# Altium PCB PCB2.PcbDoc
Units mil, origin at the board's own origin, x right, y up, seen from the top; angles counter-clockwise.
Board outline 6000 x 4000 mil, 2 copper layers (Top Layer, Bottom Layer); 64 components, 29 nets, 148 pads, 8 vias.
Unrouted connection lines stored in the file: 52.
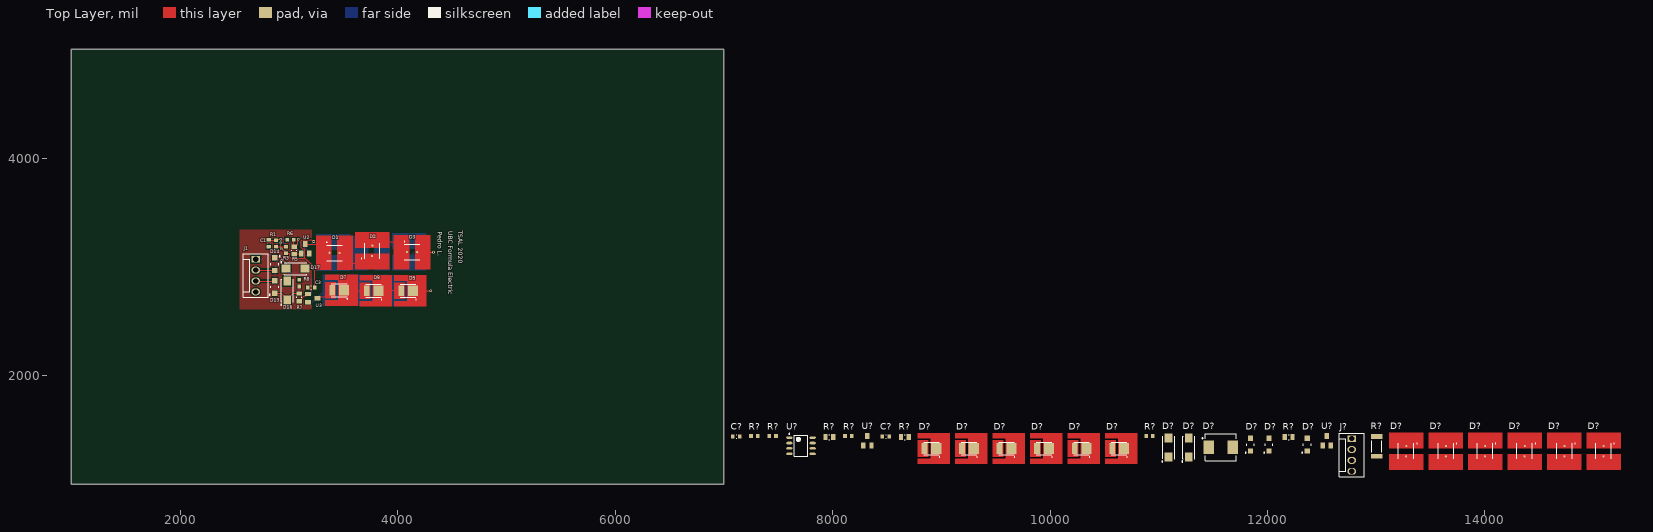
[diagram p0: Top Layer view]
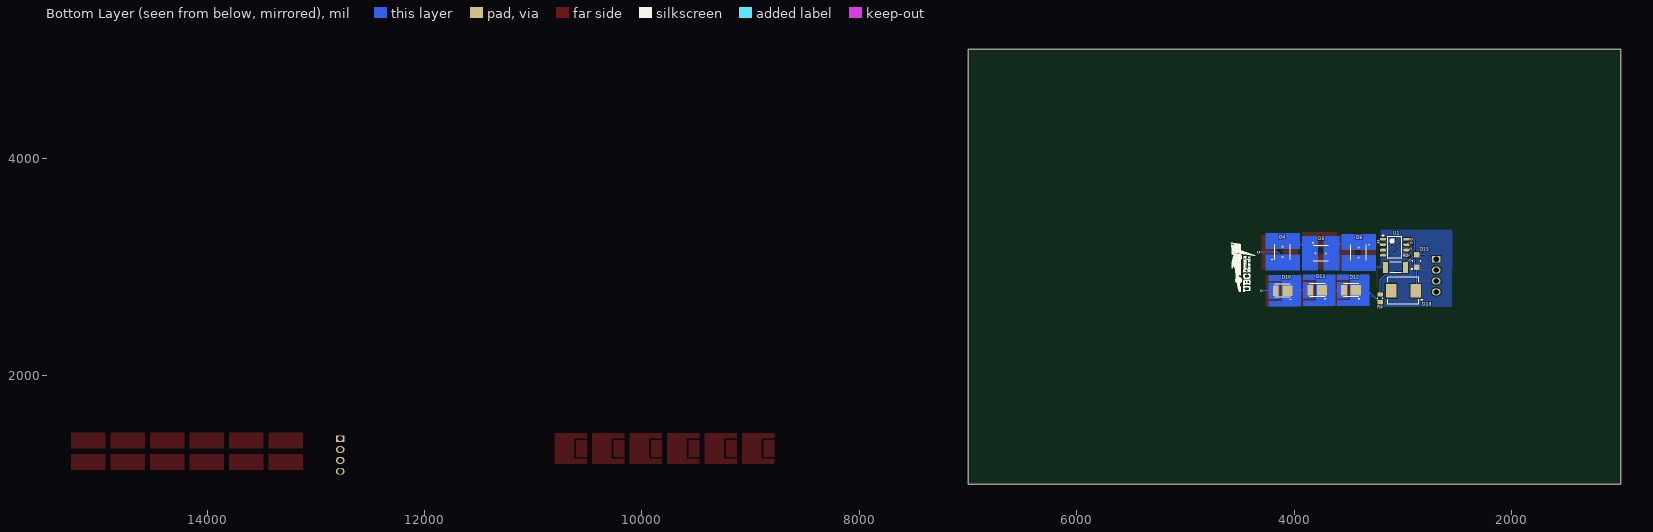
[diagram p1: Bottom Layer view, seen from below]

## Layer stack, top to bottom
Top Solder: solder mask 0.4, Solder Resist, Dk 3.5
Top Layer: signal copper 1.4
Dielectric 1: dielectric 12.6, FR-4, Dk 4.8
Bottom Layer: signal copper 1.4
Bottom Solder: solder mask 0.4, Solder Resist, Dk 3.5

## Board outline
1000,1000 7000,1000 7000,5000 1000,5000

## Design rules (kind name [scope] priority, off if disabled: settings)
Clearance [All] p1: gap=10 ignorepadtopadclearanceinfootprint=FALSE except(0: Arc-Hole Track-Hole SMDPad-Hole THPad-Hole Via-Hole Fill-Hole Poly-Hole Region-Hole Text-Hole)
PolygonConnect [All] p1: connectstyle=Relief reliefconductorwidth=10 reliefentries=4 polygonreliefangle="90 Angle" airgapwidth=10
RoomDefinition TSAL_PL [InComponentClass('TSAL_PL')] p1: confinementstyle=ConfineIn formatcopy=TRUE lockcomponents=FALSE outline 0,0 2000,0 2000,1000 0,1000
RoomDefinition Sheet1 [InComponentClass('Sheet1')] p2: confinementstyle=ConfineIn formatcopy=TRUE lockcomponents=FALSE outline 7045,1060 15255,1060 15255,1580 7045,1580
RoutingVias [All] p1: holewidth=28 width=50 viastyle="Through Hole" minholewidth=28 minwidth=50 maxholewidth=28 maxwidth=50
SolderMaskExpansion [All] p1: expansion=4 istentingtop=FALSE
Width [All] p1: maxlimit=10 minlimit=10 preferedwidth=10
30 further rules are at their usual default settings.

## Classes and differential pairs
component class TSAL_PL: C1 C3 D1 D2 D3 D4 D5 D6 D7 D8 D9 D10 D11 D12 D13 D14 D15 D16 D17 D18 J1 R1 R2 R3 R4 R5 R6 R7 R8 U1 U2 U3
component class Sheet1: C? D? J? R? U?

## Components (designator, comment, footprint, x,y, rotation, side; value= is the part's Value field where it differs from the comment)
C1 "0603" "0603 CAPACITOR (TDK C-SERIES)" 2815,3217.52 r270 top
C3 "0603" "0603 CAPACITOR (TDK C-SERIES)" 3205,2810 r180 top
C? "0603" "0603 CAPACITOR (TDK C-SERIES)" 8490,1440 r0 top
C? "0603" "0603 CAPACITOR (TDK C-SERIES)" 7115,1440 r0 top
D1 "RED" "RED LED" 3419.17,3127.72 r90 top
D2 "RED" "RED LED" 3766.97,3147.24 r180 top
D3 "RED" "RED LED" 4132.76,3135 r90 top
D4 "RED" "RED LED" 4107.91,3137.76 r0 bottom
D5 "RED" "RED LED" 3757.76,3123.03 r90 bottom
D6 "RED" "RED LED" 3410,3132.24 r180 bottom
D7 "GREEN" "GREEN LED" 3497.91,2785.32 r0 top
D8 "GREEN" "GREEN LED" 3814.06,2780.32 r0 top
D9 "GREEN" "GREEN LED" 4131.14,2780 r0 top
D10 "GREEN" "GREEN LED" 4073.86,2780 r180 bottom
D11 "GREEN" "GREEN LED" 3755.79,2785 r180 bottom
D12 "GREEN" "GREEN LED" 3444.61,2785.32 r180 bottom
D13 "NRVTS260ESFT1G" "ON NRVTS260ESFT1G" 2870,2815 r90 top
D14 "NRVTS260ESFT1G" "ON NRVTS260ESFT1G" 2870,3025 r270 top
D15 "NRVTS260ESFT1G" "ON NRVTS260ESFT1G" 2875,3053.07 r90 bottom
D16 "SMAJ6.0A" "LITTELFUSE SMAJ6.0A" 2985,2783.39 r90 top
D17 "SMAJ6.0A" "LITTELFUSE SMAJ6.0A" 3060,2985 r0 top
D18 "SMCJ24A" "LITTELFUSE SMCJ24A" 2997.8,2780 r0 bottom
D? "RED" "RED LED" 14000,1305 r0 top
D? "RED" "RED LED" 15090,1305 r0 top
D? "NRVTS260ESFT1G" "ON NRVTS260ESFT1G" 12365,1365 r90 top
D? "RED" "RED LED" 13640,1305 r0 top
D? "SMAJ6.0A" "LITTELFUSE SMAJ6.0A" 11090,1340 r90 top
D? "SMCJ24A" "LITTELFUSE SMCJ24A" 11570,1340 r0 top
D? "GREEN" "GREEN LED" 9290,1330 r0 top
D? "GREEN" "GREEN LED" 8945,1330 r0 top
D? "NRVTS260ESFT1G" "ON NRVTS260ESFT1G" 12015,1365 r90 top
D? "RED" "RED LED" 13275,1305 r0 top
D? "SMAJ6.0A" "LITTELFUSE SMAJ6.0A" 11275,1340 r90 top
D? "GREEN" "GREEN LED" 9980,1330 r0 top
D? "NRVTS260ESFT1G" "ON NRVTS260ESFT1G" 11845,1365 r90 top
D? "GREEN" "GREEN LED" 10325,1330 r0 top
D? "GREEN" "GREEN LED" 9635,1330 r0 top
D? "RED" "RED LED" 14365,1305 r0 top
D? "RED" "RED LED" 14730,1305 r0 top
D? "GREEN" "GREEN LED" 10670,1330 r0 top
J1 "1x4 Header" HDR1x4 2695,2920 r0 top
J? "1x4 Header" HDR1x4 12775,1270 r0 top
R1 "0603" "0603 RESISTOR (YAGEO)" 2880,3214.49 r90 top
R2 "2010" "2010 RESISTOR (YAGEO)" 3070,2995 r180 bottom
R3 "0603" "0603 RESISTOR (YAGEO)" 2975,3155 r90 top
R4 "RL1220S-270-F" "0805 RESISTOR (YAGEO)" 3210,2710 r90 bottom
R5 "0805" "0805 RESISTOR (YAGEO)" 3050,3150.43 r270 top
R6 "0603" "0603 RESISTOR (YAGEO)" 3014.49,3250 r0 top
R7 "0805" "0805 RESISTOR (YAGEO)" 3095,2720.43 r270 top
R8 "0603" "0603 RESISTOR (YAGEO)" 3095,2850 r270 top
R? "0805" "0805 RESISTOR (YAGEO)" 7970,1435 r0 top
R? "0603" "0603 RESISTOR (YAGEO)" 10915,1445 r0 top
R? "0603" "0603 RESISTOR (YAGEO)" 7280,1445 r0 top
R? "2010" "2010 RESISTOR (YAGEO)" 13005,1350 r90 top
R? "0603" "0603 RESISTOR (YAGEO)" 8145,1445 r0 top
R? "0805" "0805 RESISTOR (YAGEO)" 12195,1435 r0 top
R? "RL1220S-270-F" "0805 RESISTOR (YAGEO)" 8665,1435 r0 top
R? "0603" "0603 RESISTOR (YAGEO)" 7450,1445 r0 top
U1 "555" SOIC-8 3077.72,3180 r180 bottom
U2 "2N7002ET1G" 2N7002ET1G 3150,3165 r0 top
U3 "2N7002ET1G" 2N7002ET1G 3218.31,2712.4 r270 top
U? "555" SOIC-8 7710,1355 r0 top
U? "2N7002ET1G" 2N7002ET1G 8320,1400 r0 top
U? "2N7002ET1G" 2N7002ET1G 12545,1400 r0 top

## Footprints (in the part's own frame and the unit in brackets; to place one, negate y for a bottom-side part, rotate by r counter-clockwise, add the part's x,y. Pads: shape width x height; smd on the part's side, far side on the other; paste and mask are expansions set on the pad)
2N7002ET1G [mm]
  rect 1x1.4 smd: 1(-0.95,-1.1) 2(0.95,-1.1) 3(0,1.1)
  body extent -1.5,-1.4 1.55,1.24, height 1.12
"0603 CAPACITOR (TDK C-SERIES)" [mm] "Chip Capacitor, 2-Leads, Body 1.60x0.80mm, IPC Medium Density"
  rect 0.8x0.95 smd: 1(-0.825,0) 2(0.825,0)
  silkscreen extent -0.05,-0.38 0.05,0.38, body extent -0.85,-0.45 0.85,0.45, height 0.9
"0603 RESISTOR (YAGEO)" [mm] "Chip Resistor, 2-Leads, Body 1.60x0.80mm, IPC Medium Density"
  rect 0.85x0.9 smd: 1(-0.775,0) 2(0.775,0)
  body extent -0.85,-0.45 0.85,0.45, height 0.55
"0805 RESISTOR (YAGEO)" [mm] "Chip Resistor, 2-Leads, Body 2.00x1.25mm, IPC Medium Density"
  rect 1x1.35 smd: 1(-0.9,0) 2(0.9,0)
  silkscreen extent -0.1,-0.58 0.1,0.58, body extent -1.05,-0.67 1.05,0.67, height 0.6
"2010 RESISTOR (YAGEO)" [mm] "Chip Resistor, 2-Leads, Body 5.00x2.50mm, IPC Medium Density"
  rect 1.15x2.65 smd: 1(-2.325,0) 2(2.325,0)
  silkscreen extent -1.35,-1.22 1.35,1.23, body extent -2.55,-1.33 2.55,1.33, height 0.65
"GREEN LED" [mm]
  rect 1.35x2.5 smd: 1(-2.5,0)
  rect 2.35x2.5 smd: 2(0.225,0)
  Top Layer region: -4.1,-3.6 -4.1,-2.4 -1.1,-2.4 -1.1,-1.25 -1.1,1.25 -1.1,2.4 -4.1,2.4 -4.1,3.6 3.4,3.6 3.4,-3.6
  Top Layer region: -4.1,-1.9 -1.7,-1.9 -1.7,-1.25 -1.7,1.25 -1.7,1.9 -4.1,1.9
  silkscreen extent -2.75,-2.07 1.07,1.5, body extent -2.65,-1.35 0.85,1.45, height 0.81
HDR1x4 [mm]
  rect 2x1.6 hole 1.2: 1(0,3.81)
  oval 2x1.6 hole 1.2: 2(0,1.27) 3(0,-1.27) 4(0,-3.81)
  silkscreen extent -2.92,-5.08 2.92,5.08, body extent -2.9,-5.08 2.9,5.08, height 11.07
"LITTELFUSE SMAJ6.0A" [mm] "TVS DIODE 6V 10.3V DO214AC"
  rect 2.1x1.8 smd: 1(-2.2,0) 2(2.2,0)
  silkscreen extent -3.42,-1.4 2.65,1.57, body extent -2.86,-1.4 2.86,1.4, height 2.29
"LITTELFUSE SMCJ24A" [mm] "TVS DIODE 24V 38.9V DO214AB"
  rect 2.45x3.15 smd: 1(-2.85,0) 2(2.85,0)
  silkscreen extent -4.37,-3.15 3.6,3.15, body extent -3.77,-3.11 3.77,3.11, height 2.62
"ON NRVTS260ESFT1G" [mm] "DIODE SCHOTTKY 60V 2A SOD123FL"
  rect 1.25x1.22 smd: 1(-1.475,0) 2(1.475,0)
  silkscreen extent -1.97,-0.9 0.2,1.28, body extent -2.12,-0.9 2.12,0.9, height 0.98
"RED LED" [mm]
  round 0.5 smd: 1(0.05,1.2) 2(0,-1.2)
  Top Layer region: 4,0.7 4,4.3 -3.95,4.3 -3.95,0.7
  Top Layer region: 4,-0.7 4,-4.3 -3.95,-4.3 -3.95,-0.7
  Top Layer region: -1.4,-0.7 -1.4,-1.7 -0.5,-1.7 -0.5,-2.5 0.5,-2.5 0.5,-1.7 1.4,-1.7 1.4,-0.7
  Top Layer region: -1.4,0.7 -1.4,1.7 -0.5,1.7 -0.5,2.5 0.5,2.5 0.5,1.7 1.4,1.7 1.4,0.7
  silkscreen extent -1.8,-1.8 2.57,1.87, body extent -1.8,-1.86 1.7,1.76, height 1.26
SOIC-8 [mm] "SOIC, 8-Leads, Body 4.91x3.90mm, Pitch 1.27mm, IPC Medium Density"
  oval 1.45x0.6 smd: 1(-2.725,1.905) 2(-2.725,0.635) 3(-2.725,-0.635) 4(-2.725,-1.905) 5(2.725,-1.905) 6(2.725,-0.635) 7(2.725,0.635) 8(2.725,1.905)
  silkscreen extent -2.85,-2.5 1.6,2.88, body extent -3,-2.5 3,2.5, height 1.75

## Part data
C1 C?: library part CL10B103KB8NNNC, "Cap Ceramic 0.01uF 50VDC X7R 10% SMD 0603 Paper T/R", Capacitance=10nF, Case Code (Metric)=1608, Dielectric=X7R, Manufacturer=Samsung, Max Operating Temperature=125°C, Min Operating Temperature=-55°C, Package Quantity=1, Supplier Part Number 1=1276-1009-1-ND, Tolerance=10%, Voltage=50V, Case Code (Imperial)=0603, Case/Package=0603, Category="Ceramic Capacitors", ComponentLink1Description=https://datasheet.ciiva.com/15195/getdatasheetpartid-357415-15195721.pdf?src-supplier=Verical, ComponentLink1URL=https://datasheet.ciiva.com/15195/getdatasheetpartid-357415-15195721.pdf?src-supplier=Verical, ComponentLink2Description=https://datasheet.ciiva.com/29198/457455-da-01-en-vs-kondensator-0603-29198644.pdf?src-supplier=Conrad, ComponentLink2URL=https://datasheet.ciiva.com/29198/457455-da-01-en-vs-kondensator-0603-29198644.pdf?src-supplier=Conrad, ComponentLink3Description=https://datasheet.ciiva.com/20173/71-0315-20173334.pdf?src-supplier=Rapid+Electronics, ComponentLink3URL=https://datasheet.ciiva.com/20173/71-0315-20173334.pdf?src-supplier=Rapid+Electronics, Contact Plating=Tin, Depth=0.8mm, Height=0.8mm, Lead Free="Lead Free", Length=1.6mm, Manufacturer Part Number=CL10B103KB8NNNC, Material=Ceramic, Mount="Surface Mount", Packaging="Cut Tape", Pricing 1="1=0.10000, 10=0.02700, 50=0.01480, 100=0.01210, 500=0.00866, 1000=0.00681 (USD)", Radiation Hardening=No, RoHS=Yes, Stock 1=3003971, Supplier 1=Digi-Key, Thickness=0.035inch, Voltage Rating=50V, Voltage Rating (DC)=50V, Width=0.031inch
C3 C?: library part UMK107ABJ105KAHT, "CAP ,MLCC ,0603,50V ,X5R,1uF 10% ,T&R", Capacitance=1uF, Case Code (Metric)=1608, Dielectric=X5R, Manufacturer="Taiyo Yuden", Max Operating Temperature=85°C, Min Operating Temperature=-55°C, Package Quantity=1, Ratings=AEC-Q200, Supplier Part Number 1=587-3501-1-ND, Tolerance=10%, Voltage Rating=50V, Case Code (Imperial)=0603, Case/Package=0603, Category="Ceramic Capacitors", ComponentLink1Description=https://datasheet.ciiva.com/18697/mlcc01-hq-e-18697528.pdf?src-supplier=Digi-Key, ComponentLink1URL=https://datasheet.ciiva.com/18697/mlcc01-hq-e-18697528.pdf?src-supplier=Digi-Key, ComponentLink2Description=https://datasheet.ciiva.com/18697/mlcc01-hq-e-18697529.pdf?src-supplier=Digi-Key, ComponentLink2URL=https://datasheet.ciiva.com/18697/mlcc01-hq-e-18697529.pdf?src-supplier=Digi-Key, ComponentLink3Description=https://datasheet.ciiva.com/18697/mlcc01-hq-e-18697530.pdf?src-supplier=Digi-Key, ComponentLink3URL=https://datasheet.ciiva.com/18697/mlcc01-hq-e-18697530.pdf?src-supplier=Digi-Key, Halogen Free="Halogen Free", Height=0.8mm, Lead Free="Lead Free", Length=0.063inch, Manufacturer Part Number=UMK107ABJ105KAHT, Mount="Surface Mount", Packaging="Cut Tape", Pricing 1="1=0.18000, 10=0.12600, 50=0.07560, 100=0.06380, 500=0.04368, 1000=0.03864 (USD)", RoHS=Yes, Stock 1=36801, Supplier 1=Digi-Key, Termination=SMD/SMT, Thickness=0.035inch, Voltage Rating (DC)=50V, Width=0.8mm
D1 D2 D3 D4 D5 D6 D? D? D? D? D? D?: library part OVS5MRBCR4, "LED 0.33W RED WTR CLR 3.5MM", Case/Package=SMD/SMT, Color=Red, Forward Current=200mA, Forward Voltage=2.2V, Manufacturer="TT Optek", Max Operating Temperature=100°C, Max Power Dissipation=330mW, Min Operating Temperature=-40°C, Package Quantity=1, Power Dissipation=750mW, Power Rating=500mW, Reverse Voltage=12V, Supplier Part Number 1=365-1546-1-ND, Test Current=150mA, Category=LEDs, ComponentLink1Description=https://datasheet.ciiva.com/2126/ovs5mabcr4-2126832.pdf?src-supplier=Digi-Key, ComponentLink1URL=https://datasheet.ciiva.com/2126/ovs5mabcr4-2126832.pdf?src-supplier=Digi-Key, ComponentLink2Description=https://datasheet.ciiva.com/16224/ovs5mrbcr4-16224208.pdf?src-supplier=Future+Electronics, ComponentLink2URL=https://datasheet.ciiva.com/16224/ovs5mrbcr4-16224208.pdf?src-supplier=Future+Electronics, ComponentLink3Description=https://datasheet.ciiva.com/2126/ovs5mabcr4-2126833.pdf?src-supplier=Digi-Key, ComponentLink3URL=https://datasheet.ciiva.com/2126/ovs5mabcr4-2126833.pdf?src-supplier=Digi-Key, ComponentLink4Description=https://datasheet.ciiva.com/46403/ovs5mabcr4-46403613.pdf?src-supplier=Element14, ComponentLink4URL=https://datasheet.ciiva.com/46403/ovs5mabcr4-46403613.pdf?src-supplier=Element14, ComponentLink5Description=https://datasheet.ciiva.com/2126/ovs5mabcr4-2126831.pdf?src-supplier=Digi-Key, ComponentLink5URL=https://datasheet.ciiva.com/2126/ovs5mabcr4-2126831.pdf?src-supplier=Digi-Key, Depth=3.5mm, Dominant Wavelength=625nm, Illumination Color=Red, Lead Free="Lead Free", Length=3.5mm, Lens Style=Clear,Diffused,Colorless, Luminous Intensity=7150mcd, Manufacturer Part Number=OVS5MRBCR4, Max Current Rating=200mA, Mount="Surface Mount", Number of Elements=1, Number of Pins=2, Packaging="Cut Tape", Pricing 1="1=0.96000, 100=0.92400, 250=0.88000, 500=0.85800 (USD)", REACH SVHC="No SVHC", RoHS=Yes, Stock 1=10132, Supplier 1=Digi-Key, Viewing Angle=120°, Wavelength=625nm
D7 D8 D9 D10 D11 D12 D? D? D? D? D? D?: library part XZDG25X109FS, "Led 3.5X2.8 0.5W SMD Green", Case Code (Imperial)=1411, Case Code (Metric)=3528, Color=Green, Forward Voltage=3.5V, Lens Color=Colorless, Manufacturer=SunLED, Supplier Part Number 1=1497-1345-1-ND, Test Current=150mA, Case/Package=1411, Category=LEDs, ComponentLink1Description=http://www.sunledusa.com/products/spec/XZDG25X109FS.pdf?src-supplier=Digi-Key, ComponentLink1URL=http://www.sunledusa.com/products/spec/XZDG25X109FS.pdf?src-supplier=Digi-Key, ComponentLink2Description=https://www.sunledusa.com/products/spec/XZDG25X109FS.pdf?src-supplier=Digi-Key, ComponentLink2URL=https://www.sunledusa.com/products/spec/XZDG25X109FS.pdf?src-supplier=Digi-Key, Dominant Wavelength=525nm, Height=1.05mm, Length=3.5mm, Lens Size=2.5mm, Lens Style=Round,Flat, Lens Transparency=Clear, Luminous Intensity=6990mcd, Manufacturer Part Number=XZDG25X109FS, Mount="Surface Mount", Packaging="Cut Tape", Pricing 1="1=1.83000, 10=1.61300, 100=0.93630, 500=0.84640, 1000=0.72738 (USD)", RoHS=No, Stock 1=1496, Supplier 1=Digi-Key, Viewing Angle=120°, Width=2.8mm
D13 D14 D15 D? D? D?: "ON SEMICONDUCTOR - NRVTS260ESFT1G - Schottky Rectifier, 60 V, 2 A, Single, SOD-123, 2 Pins, 650 mV", Average Rectified Current=2A, Case/Package=SOD, Forward Voltage=650mV, Manufacturer="ON Semiconductor", Max Forward Surge Current (Ifsm)=25A, Max Operating Temperature=175°C, Max Repetitive Reverse Voltage (Vrrm)=60V, Max Reverse Current=12uA, Min Operating Temperature=-65°C, Package Quantity=1, Peak Non-Repetitive Surge Current=50A, Supplier Part Number 1=NRVTS260ESFT1GOSCT-ND, Category="Schottky Diodes", ComponentLink1Description=https://datasheet.ciiva.com/53019/nts260esf-d-53019548.pdf?src-supplier=Digi-Key, ComponentLink1URL=https://datasheet.ciiva.com/53019/nts260esf-d-53019548.pdf?src-supplier=Digi-Key, Element Configuration=Single, Forward Current=2A, Height=0.88mm, Lead Free="Lead Free", Length=2.9mm, Manufacturer Part Number=NRVTS260ESFT1G, Max Reverse Voltage (DC)=60V, Mount="Surface Mount", Number of Pins=2, Packaging="Cut Tape", Pricing 1="1=0.34000, 10=0.22100, 100=0.11060, 500=0.09164, 1000=0.06004 (USD)", REACH SVHC="No SVHC", Reverse Voltage (DC)=60V, RoHS=Yes, Supplier 1=Digi-Key, Width=1.8mm
D16 D17 D? D?: "In a Pack of 25, Littelfuse SMAJ6.0A, Uni-Directional TVS Diode, 400W, 2-Pin DO-214AC", Breakdown Voltage=6.67V, Clamping Voltage=10.3V, Current=41A, Leakage Current=1uA, Manufacturer=Littelfuse, Max Breakdown Voltage=7.37V, Max Operating Temperature=150°C, Max Power Dissipation=3.3W, Max Surge Current=38.8A, Min Operating Temperature=-55°C, Operating Supply Voltage=6V, Package Quantity=1, Peak Pulse Current=4.1A, Peak Pulse Power=400W, Power Line Protection=No, Resistor Type=Zener, Reverse Breakdown Voltage=66.7V, Supplier Part Number 1=SMAJ6.0ALFCT-ND, Test Current=1mA, Voltage=60V, Category="TVS Diodes", ComponentLink1Description=https://datasheet.ciiva.com/330/littelfuse-tvs-diode-smaj-datasheet-pdf-330721.pdf?src-supplier=Digi-Key, ComponentLink1URL=https://datasheet.ciiva.com/330/littelfuse-tvs-diode-smaj-datasheet-pdf-330721.pdf?src-supplier=Digi-Key, ComponentLink2Description=https://datasheet.ciiva.com/330/littelfuse-tvs-diode-smaj-datasheet-pdf-330722.pdf?src-supplier=Digi-Key, ComponentLink2URL=https://datasheet.ciiva.com/330/littelfuse-tvs-diode-smaj-datasheet-pdf-330722.pdf?src-supplier=Digi-Key, ComponentLink3Description=https://datasheet.ciiva.com/330/littelfuse-tvs-diode-smaj-datasheet-pdf-330723.pdf?src-supplier=Digi-Key, ComponentLink3URL=https://datasheet.ciiva.com/330/littelfuse-tvs-diode-smaj-datasheet-pdf-330723.pdf?src-supplier=Digi-Key, ComponentLink4Description=https://datasheet.ciiva.com/330/littelfuse-tvs-diode-smaj-datasheet-pdf-330712.pdf?src-supplier=Digi-Key, ComponentLink4URL=https://datasheet.ciiva.com/330/littelfuse-tvs-diode-smaj-datasheet-pdf-330712.pdf?src-supplier=Digi-Key, ComponentLink5Description=https://datasheet.ciiva.com/28473/607617-28473464.pdf?src-supplier=Element14, ComponentLink5URL=https://datasheet.ciiva.com/28473/607617-28473464.pdf?src-supplier=Element14, ComponentLink6Description=https://datasheet.ciiva.com/330/littelfuse-tvs-diode-smaj-datasheet-pdf-330713.pdf?src-supplier=Digi-Key, ComponentLink6URL=https://datasheet.ciiva.com/330/littelfuse-tvs-diode-smaj-datasheet-pdf-330713.pdf?src-supplier=Digi-Key, ComponentLink7Description=https://datasheet.ciiva.com/16391/littelfuse-tvs-diode-smaj-16391801.pdf?src-supplier=Future+Electronics, ComponentLink7URL=https://datasheet.ciiva.com/16391/littelfuse-tvs-diode-smaj-16391801.pdf?src-supplier=Future+Electronics, ComponentLink8Description=https://datasheet.ciiva.com/16487/littelfuse-tvs-diode-smaj-16487499.pdf?src-supplier=Future+Electronics, ComponentLink8URL=https://datasheet.ciiva.com/16487/littelfuse-tvs-diode-smaj-16487499.pdf?src-supplier=Future+Electronics, Direction=Unidirectional, Height=2.29mm, Lead Free="Lead Free", Length=5.28mm, Manufacturer Part Number=SMAJ6.0A, Min Breakdown Voltage=6.67V, Mount="Surface Mount", Number of Channels=1, Number of Elements=1, Number of Pins=2, Number of Unidirectional Channels=1, Packaging="Cut Tape", Polarity=Unidirectional, Power Dissipation=400W, Pricing 1="1=0.36000, 10=0.24800, 100=0.14180, 500=0.10800, 1000=0.07875, 2000=0.07650 (USD)", Radiation Hardening=No, REACH SVHC="No SVHC", Reverse Standoff Voltage=6V, RoHS=Yes, Stock 1=50756, Supplier 1=Digi-Key, Termination=SMD/SMT, Voltage Rating (DC)=6V, Width=2.79mm
D18 D?: "LITTELFUSE - SMCJ24A - TVS Diode, TRANSZORB SMCJ Series, Unidirectional, 24 V, 38.9 V, DO-214AB (SMC), 2 Pins", Breakdown Voltage=26.7V, Clamping Voltage=38.9V, Leakage Current=1uA, Manufacturer=Littelfuse, Max Breakdown Voltage=29.5V, Max Operating Temperature=150°C, Max Power Dissipation=6.5W, Max Surge Current=38.6A, Min Operating Temperature=-65°C, Operating Supply Voltage=24V, Package Quantity=1, Peak Pulse Power=1.5kW, Power Line Protection=No, Resistor Type=Zener, Supplier Part Number 1=SMCJ24ALFCT-ND, Test Current=1mA, Category=Diodes, ComponentLink1Description=https://datasheet.ciiva.com/341/littelfuse-tvs-diode-smcj-datasheet-pdf-341029.pdf?src-supplier=Digi-Key, ComponentLink1URL=https://datasheet.ciiva.com/341/littelfuse-tvs-diode-smcj-datasheet-pdf-341029.pdf?src-supplier=Digi-Key, ComponentLink2Description=https://datasheet.ciiva.com/8062/littelfuse-tvs-diode-smcj-8062373.pdf?src-supplier=Element14, ComponentLink2URL=https://datasheet.ciiva.com/8062/littelfuse-tvs-diode-smcj-8062373.pdf?src-supplier=Element14, ComponentLink3Description=https://datasheet.ciiva.com/341/littelfuse-tvs-diode-smcj-datasheet-pdf-341030.pdf?src-supplier=Digi-Key, ComponentLink3URL=https://datasheet.ciiva.com/341/littelfuse-tvs-diode-smcj-datasheet-pdf-341030.pdf?src-supplier=Digi-Key, ComponentLink4Description=https://datasheet.ciiva.com/341/littelfuse-tvs-diode-smcj-datasheet-pdf-341031.pdf?src-supplier=Digi-Key, ComponentLink4URL=https://datasheet.ciiva.com/341/littelfuse-tvs-diode-smcj-datasheet-pdf-341031.pdf?src-supplier=Digi-Key, Direction=Unidirectional, Element Configuration=Single, Height=2.417mm, Lead Free="Lead Free", Length=7.11mm, Manufacturer Part Number=SMCJ24A, Max Reverse Leakage Current=1uA, Min Breakdown Voltage=26.7V, Mount="Surface Mount", Number of Channels=1, Number of Elements=1, Number of Pins=2, Number of Unidirectional Channels=1, Packaging="Cut Tape", Peak Pulse Current=38.6A, Polarity=Unidirectional, Power Dissipation=1.5kW, Pricing 1="1=0.55000, 10=0.43800, 100=0.31250, 500=0.23750, 1000=0.18750 (USD)", REACH SVHC="No SVHC", Reverse Breakdown Voltage=26.7V, Reverse Standoff Voltage=24V, RoHS=Yes, Stock 1=17092, Supplier 1=Digi-Key, Termination=SMD/SMT, Voltage Rating (DC)=24V, Width=6.22mm
J1 J?: library part 22-27-2041, "Conn Wire to Board HDR 4 POS 2.54mm Solder ST Thru-Hole Bag", Color=Natural, Contact Resistance=10mR, Housing Color=White, Manufacturer=Molex, Max Operating Temperature=75°C, Min Operating Temperature=0°C, Supplier Part Number 1=WM4113-ND, Category="Headers and Wire Housings", ComponentLink1Description=https://datasheet.ciiva.com/6813/022272021-sd-6813678.pdf?src-supplier=Digi-Key, ComponentLink1URL=https://datasheet.ciiva.com/6813/022272021-sd-6813678.pdf?src-supplier=Digi-Key, ComponentLink2Description=https://datasheet.ciiva.com/7844/1625756-7844114.pdf?src-supplier=Element14, ComponentLink2URL=https://datasheet.ciiva.com/7844/1625756-7844114.pdf?src-supplier=Element14, ComponentLink3Description=https://datasheet.ciiva.com/11746/0900766b80462714-11746241.pdf?src-supplier=RSComponents, ComponentLink3URL=https://datasheet.ciiva.com/11746/0900766b80462714-11746241.pdf?src-supplier=RSComponents, ComponentLink4Description=https://datasheet.ciiva.com/20207/22-0838e-20207115.pdf?src-supplier=Rapid+Electronics, ComponentLink4URL=https://datasheet.ciiva.com/20207/22-0838e-20207115.pdf?src-supplier=Rapid+Electronics, ComponentLink5Description=https://datasheet.ciiva.com/15217/getdatasheetpartid-176661-15217685.pdf?src-supplier=Verical, ComponentLink5URL=https://datasheet.ciiva.com/15217/getdatasheetpartid-176661-15217685.pdf?src-supplier=Verical, ComponentLink6Description=https://datasheet.ciiva.com/49385/879300-49385686.pdf?src-supplier=Jameco, ComponentLink6URL=https://datasheet.ciiva.com/49385/879300-49385686.pdf?src-supplier=Jameco, Connector Type="Male Pin", Contact Material=Brass, Contact Mating Length=0.295inch, Contact Plating=Tin,Copper, Depth=5.8mm, Fastening Type=Friction, Gender=Male, Housing Material=Nylon, Length=10.16mm, Manufacturer Part Number=22-27-2041, Mount="Surface Mount", Number of Contacts=4, Number of Positions=4, Number of Rows=1, Orientation=Straight, Packaging="Cut Tape", Pitch=2.54mm, Pricing 1="1=0.40000, 10=0.38300, 100=0.26800, 500=0.22974, 1000=0.19145, 5000=0.16410, 10000=0.15316 (USD)", RoHS=Yes, Stock 1=5089, Supplier 1=Digi-Key, Termination=Solder
R1 R?: library part CRCW060322K0FKEAC, "Res Thick Film 0603 22K Ohm 1% 1/10W ±100ppm/°C Molded SMD Paper T/R", Case/Package=Molded, Manufacturer="Vishay Semiconductors", Max Operating Temperature=155°C, Min Operating Temperature=-55°C, Power Rating=100mW, Resistance=22k, Resistor Type="Thick Film", Supplier Part Number 1=541-4036-1-ND, Temperature Coefficient=100ppm/°C, Tolerance=1%, Category=Resistors, ComponentLink1Description=http://www.vishay.com/docs/28773/crcwce3.pdf?src-supplier=Digi-Key, ComponentLink1URL=http://www.vishay.com/docs/28773/crcwce3.pdf?src-supplier=Digi-Key, ComponentLink2Description=http://www.vishay.com/docs/20035/dcrcwe3.pdf?src-supplier=Avnet+Asia, ComponentLink2URL=http://www.vishay.com/docs/20035/dcrcwe3.pdf?src-supplier=Avnet+Asia, Contact Plating=Tin, Lead Free="Lead Free", Length=1.55mm, Manufacturer Part Number=CRCW060322K0FKEAC, Mount="Surface Mount", Pricing 1="1=0.10000, 10=0.03100, 100=0.01260, 1000=0.00567, 2500=0.00492 (USD)", RoHS=Yes, Stock 1=48223, Supplier 1=Digi-Key, Termination=Wraparound
R2 R?: "TE CONNECTIVITY - CRGP2010F100R - RES, 100R, 1%, 1.25W, 2010, THICK FILM", Manufacturer="TE Connectivity", Manufacturer Part Number=CRGP2010F100R, Resistence=100R, Supplier Part Number 1=A130648CT-ND, Category="Chip SMD Resistors", ComponentLink1Description=https://www.te.com/commerce/DocumentDelivery/DDEController?Action=srchrtrv&amp;DocNm=9-1773463-9&amp;DocType=DS&amp;DocLang=English&src-supplier=Digi-Key, ComponentLink1URL=https://www.te.com/commerce/DocumentDelivery/DDEController?Action=srchrtrv&amp;DocNm=9-1773463-9&amp;DocType=DS&amp;DocLang=English&src-supplier=Digi-Key, ComponentLink2Description=https://4donline.ihs.com/images/VipMasterIC/IC/TYEL/TYEL-S-A0005460475/TYEL-S-A0005460475-1.pdf?hkey=52A5661711E402568146F3353EA87419&src-supplier=Farnell, ComponentLink2URL=https://4donline.ihs.com/images/VipMasterIC/IC/TYEL/TYEL-S-A0005460475/TYEL-S-A0005460475-1.pdf?hkey=52A5661711E402568146F3353EA87419&src-supplier=Farnell, ComponentLink3Description=https://4donline.ihs.com/images/VipMasterIC/IC/TYEL/TYEL-S-A0005460475/TYEL-S-A0005460475-1.pdf?hkey=52A5661711E402568146F3353EA87419&src-supplier=Newark, ComponentLink3URL=https://4donline.ihs.com/images/VipMasterIC/IC/TYEL/TYEL-S-A0005460475/TYEL-S-A0005460475-1.pdf?hkey=52A5661711E402568146F3353EA87419&src-supplier=Newark, Pricing 1="1=0.37000, 10=0.28600, 100=0.12040, 1000=0.06643 (USD)", RoHS=No, Stock 1=14514, Supplier 1=Digi-Key
R3 R6 R8 R? R? R?: library part CRCW0603200KFKEAC, "Res Thick Film 0603 200K Ohm 1% 1/10W ±100ppm/°C Molded SMD Paper T/R", Case/Package=Molded, Manufacturer=Vishay, Max Operating Temperature=155°C, Min Operating Temperature=-55°C, Power Rating=100mW, Resistance=200k, Resistor Type="Thick Film", Supplier Part Number 1=541-4027-1-ND, Temperature Coefficient=100ppm/°C, Tolerance=1%, Category=Resistors, ComponentLink1Description=http://www.vishay.com/docs/28773/crcwce3.pdf?src-supplier=Digi-Key, ComponentLink1URL=http://www.vishay.com/docs/28773/crcwce3.pdf?src-supplier=Digi-Key, Contact Plating=Tin, Lead Free="Lead Free", Length=1.55mm, Manufacturer Part Number=CRCW0603200KFKEAC, Mount="Surface Mount", Pricing 1="1=0.10000, 10=0.03100, 100=0.01260, 1000=0.00567, 2500=0.00492 (USD)", RoHS=Yes, Stock 1=12235, Supplier 1=Digi-Key, Termination=Wraparound
R4 R?: "RES SMD 27 OHM 1% 1/3W 0805", Case/Package=0805, Manufacturer=Susumu, Package Quantity=1, Resistance=27R, Supplier Part Number 1=408-1396-1-ND, Category="Chip SMD Resistors", ComponentLink1Description=http://www.mouser.com/ds/2/392/RL_Data_sheet-263250.pdf?src-supplier=Mouser, ComponentLink1URL=http://www.mouser.com/ds/2/392/RL_Data_sheet-263250.pdf?src-supplier=Mouser, ComponentLink2Description=http://www.susumu.co.jp/common/pdf/n_catalog_partition08_en.pdf?src-supplier=Digi-Key, ComponentLink2URL=http://www.susumu.co.jp/common/pdf/n_catalog_partition08_en.pdf?src-supplier=Digi-Key, Height=0.4mm, Length=2mm, Manufacturer Part Number=RL1220S-270-F, Packaging="Cut Tape", Pricing 1="1=0.34000, 10=0.28900, 25=0.21000, 50=0.15220, 100=0.11290, 250=0.08664, 500=0.06826, 1000=0.04725 (USD)", RoHS=Yes, Stock 1=2466, Supplier 1=Digi-Key, Termination=SMD/SMT, Weight=0.000194oz, Width=1.25mm
R5 R7 R? R?: library part RT0805DRD07100RL, "RES SMD 100 OHM 0.5% 1/8W 0805", Case Code (Metric)=2012, Manufacturer=Yageo, Max Operating Temperature=155°C, Max Power Dissipation=125mW, Min Operating Temperature=-55°C, Package Quantity=1, Resistance=100R, Resistor Type="Thin Film", Supplier Part Number 1=311-2698-1-ND, Temperature Coefficient=25ppm/°C, Tolerance=0.5%, Voltage Rating (DC)=150V, Case Code (Imperial)=0805, Case/Package=0805, Category="Chip SMD Resistors", ComponentLink1Description=https://datasheet.ciiva.com/2575/pyu-rt-1-to-0-05-rohs-l-5-2575581.pdf?src-supplier=Digi-Key, ComponentLink1URL=https://datasheet.ciiva.com/2575/pyu-rt-1-to-0-05-rohs-l-5-2575581.pdf?src-supplier=Digi-Key, Contact Plating=Tin,Matte, Features="Moisture Resistant", Height=0.024inch, Lead Free="Lead Free", Length=0.079inch, Manufacturer Part Number=RT0805DRD07100RL, Number of Terminations=2, Packaging="Cut Tape", Power Rating=125mW, Pricing 1="1=0.23000, 10=0.19200, 100=0.07490, 1000=0.03137, 2500=0.02876 (USD)", Radiation Hardening=No, RoHS=Yes, Stock 1=7222, Supplier 1=Digi-Key, Width=0.049inch
U1 U?: library part SA555DRG4, "IC OSC SGL TIMER 100KHZ 8-SOIC", Case/Package=SOIC, Frequency=100kHz, High Level Output Current=-200mA, Low Level Output Current=200mA, Manufacturer="Texas Instruments", Max Operating Temperature=85°C, Max Supply Voltage=16V, Min Operating Temperature=-40°C, Min Supply Voltage=4.5V, Nominal Supply Current=2mA, Operating Supply Current=10mA, Package Quantity=1, Quiescent Current=15mA, Supplier Part Number 1=296-48948-1-ND, Category="Timers and Oscillators", ComponentLink1Description=https://datasheet.ciiva.com/26943/getdatasheetpartid-624446-26943897.pdf?src-supplier=Verical, ComponentLink1URL=https://datasheet.ciiva.com/26943/getdatasheetpartid-624446-26943897.pdf?src-supplier=Verical, ComponentLink2Description=https://datasheet.ciiva.com/1235/sa555-1235928.pdf?src-supplier=Digi-Key, ComponentLink2URL=https://datasheet.ciiva.com/1235/sa555-1235928.pdf?src-supplier=Digi-Key, ComponentLink3Description=https://datasheet.ciiva.com/14274/se555m-14274518.pdf?src-supplier=Avnet, ComponentLink3URL=https://datasheet.ciiva.com/14274/se555m-14274518.pdf?src-supplier=Avnet, Lead Free="Lead Free", Manufacturer Part Number=SA555DRG4, Mount="Surface Mount", Number of Pins=8, Number of Timers/Counters=1, Packaging="Cut Tape", Pricing 1="1=0.39000, 10=0.31500, 25=0.28800, 100=0.21440, 250=0.19432, 500=0.16080, 1000=0.12060 (USD)", Radiation Hardening=No, RoHS=Yes, Stock 1=1131, Supplier 1=Digi-Key, Weight=0.002561oz
U2 U3 U? U?: "Trans MOSFET N-CH 60V 0.26A 3-Pin SOT-23 T/R", Case/Package=SOT-23-3, Continuous Drain Current (ID)=260mA, Drain to Source Breakdown Voltage=60V, Drain to Source Resistance=2.5R, Gate to Source Voltage (Vgs)=20V, Input Capacitance=26.7pF, Manufacturer="ON Semiconductor", Max Operating Temperature=150°C, Max Power Dissipation=300mW, Min Operating Temperature=-55°C, Package Quantity=1, Supplier Part Number 1=2N7002ET1GOSCT-ND, Threshold Voltage=1V, Category=MOSFETs, ComponentLink1Description=https://datasheet.ciiva.com/936/2n7002e-d-936787.pdf?src-supplier=Digi-Key, ComponentLink1URL=https://datasheet.ciiva.com/936/2n7002e-d-936787.pdf?src-supplier=Digi-Key, ComponentLink2Description=https://datasheet.ciiva.com/8059/2n7002e-d-8059427.pdf?src-supplier=Element14, ComponentLink2URL=https://datasheet.ciiva.com/8059/2n7002e-d-8059427.pdf?src-supplier=Element14, ComponentLink3Description=https://datasheet.ciiva.com/13060/2n7002e-d-105476-13060091.pdf?src-supplier=Mouser, ComponentLink3URL=https://datasheet.ciiva.com/13060/2n7002e-d-105476-13060091.pdf?src-supplier=Mouser, ComponentLink4Description=https://datasheet.ciiva.com/26146/2n7002e-d-26146200.pdf?src-supplier=Avnet+Europe, ComponentLink4URL=https://datasheet.ciiva.com/26146/2n7002e-d-26146200.pdf?src-supplier=Avnet+Europe, ComponentLink5Description=https://datasheet.ciiva.com/49018/70339334-49018202.pdf?src-supplier=Allied+Electronics, ComponentLink5URL=https://datasheet.ciiva.com/49018/70339334-49018202.pdf?src-supplier=Allied+Electronics, ComponentLink6Description=https://datasheet.ciiva.com/22641/1708226-22641627.pdf?src-supplier=Element14, ComponentLink6URL=https://datasheet.ciiva.com/22641/1708226-22641627.pdf?src-supplier=Element14, ComponentLink7Description=https://datasheet.ciiva.com/22641/1708226-22641628.pdf?src-supplier=Element14, ComponentLink7URL=https://datasheet.ciiva.com/22641/1708226-22641628.pdf?src-supplier=Element14, ComponentLink8Description=https://datasheet.ciiva.com/936/2n7002e-d-936788.pdf?src-supplier=Digi-Key, ComponentLink8URL=https://datasheet.ciiva.com/936/2n7002e-d-936788.pdf?src-supplier=Digi-Key, ComponentLink9Description=https://datasheet.ciiva.com/936/2n7002e-d-936789.pdf?src-supplier=Digi-Key, ComponentLink9URL=https://datasheet.ciiva.com/936/2n7002e-d-936789.pdf?src-supplier=Digi-Key, ComponentLink10Description=https://datasheet.ciiva.com/3304/2n7002e-d-3304389.pdf?src-supplier=Avnet, ComponentLink10URL=https://datasheet.ciiva.com/3304/2n7002e-d-3304389.pdf?src-supplier=Avnet, ComponentLink11Description=https://datasheet.ciiva.com/3304/2n7002e-d-3304390.pdf?src-supplier=Avnet, ComponentLink11URL=https://datasheet.ciiva.com/3304/2n7002e-d-3304390.pdf?src-supplier=Avnet, ComponentLink12Description=https://datasheet.ciiva.com/15198/getdatasheetpartid-53846-15198758.pdf?src-supplier=Verical, ComponentLink12URL=https://datasheet.ciiva.com/15198/getdatasheetpartid-53846-15198758.pdf?src-supplier=Verical, ComponentLink13Description=https://datasheet.ciiva.com/16305/2n7002e-d-16305452.pdf?src-supplier=Future+Electronics, ComponentLink13URL=https://datasheet.ciiva.com/16305/2n7002e-d-16305452.pdf?src-supplier=Future+Electronics, Element Configuration=Single, Fall Time=1.2ns, Halogen Free="Halogen Free", Height=0.94mm, Lead Free="Lead Free", Length=2.9mm, Manufacturer Part Number=2N7002ET1G, Nominal Vgs=1V, Number of Elements=1, Number of Pins=3, On-State Resistance=2.5R, Packaging="Cut Tape", Power Dissipation=300mW, Pricing 1="1=0.18000, 10=0.16300, 25=0.15520, 100=0.06820, 500=0.05356, 1000=0.03720 (USD)", Radiation Hardening=No, Rds On Max=2.5R, REACH SVHC="No SVHC", Rise Time=1.2ns, RoHS=Yes, Stock 1=151215, Supplier 1=Digi-Key, Turn-Off Delay Time=4.8ns, Turn-On Delay Time=1.7ns, Width=1.3mm

## Via types
v1: diameter 23.62, hole 11.81, Top Layer to Bottom Layer, 8 vias

## Nets (pads, with @x,y where several pads share a name; then routed paths per layer and width w, separated by ;. In a path a pad name is that pad's centre, name@x,y a point inside that pad or via, vN(x,y) a via of type N, cw(c..) or ccw(c..) an arc to the next point about the centre after c; other vN are vias at no path point)
+24V: D14.1 D17.1 D?.1@11275,1253.39 D?.1@12015,1306.93 R2.2 R4.2 R?.2@8700.43,1435 R?.2@13005,1441.54 | length 720.3
  Top Layer w10: D14.1@2870,3091.14 2918.86,3091.14 2950,3060 ; v1(2935,3060) 2950,3060 ; D17.1@2970,2998.39 D17.1@2973.39,2995 ; D17.1@2975,2985 2975,3035 2950,3060
  Bottom Layer w10: v1(2935,3060) 2945,3060 2980,3025 2978.46,3023.46 R2.2 2978.46,2965.47 2996.1,2947.83 3070.04,2947.83 3092.87,2925 3166.81,2925 3210,2881.81 R4.2
DISCH: R1.1 R3.2 R?.1@8114.49,1445 R?.2@7310.51,1445 U1.7 U?.7 | length 182.8
  Top Layer w10: R1.1@2880,3185 2927.24,3185 ; v1(2925,3220) 2925,3187.24 2927.24,3185 ; R3.2 2974.49,3185 2927.24,3185
  Bottom Layer w10: v1(2925,3220) 2955.43,3220 U1.7
GND: C1.2 C3.2 C?.2 D16.2 D17.2 D18.2 D?.2@11090,1426.61 D?.2@11275,1426.61 D?.2@11682.2,1340 J1.4 J?.4 R6.1 R8.1 R?.1@7419.49,1445 R?.1@10884.49,1445 U1.1 U2.2 U3.2 U?.1@7602.72,1430 U?.2@8357.4,1356.69 U?.2@12582.4,1356.69
GREEN_IN: D13.1 D16.1 D?.1@11090,1253.39 D?.1@12365,1306.93 R7.1 R8.2 R?.1@7934.57,1435 R?.2@7480.51,1445 | length 339
  Top Layer w10: D13.1 2930.75,2756.93 D16.1@2985,2702.68 ; D16.1 D16.1@2985,2702.68 ; R8.2 R7.1 3038.19,2755.87 D16.1@2985,2702.68
NetD1_1: D1.1 U2.3 | length 254.5
  Top Layer w10: U2.3 3151.86,3206.44 3295.17,3206.44 D1.1
NetD1_2: D1.2 D2.1 | length 316.1
  Top Layer w10: 3517.6,3108.03 3517.6,3037.6 3523.46,3031.74 3714.46,3031.74 3747.28,3064.57
NetD2_2: D2.2 D3.1 | length 318.2
  Top Layer w10: 3747.28,3229.92 3959.09,3229.92 4034.33,3154.68
NetD3_2: D3.2 D4.1 | length 337.4
  Top Layer w10: 4231.18,3135 v1(4330,3135)
  Bottom Layer w10: D4.1 4154.37,3135 v1(4330,3135)
NetD4_2: D4.2 D5.1 | length 272.4
  Bottom Layer w10: 3856.18,3123.03 3953.58,3220.43 4088.23,3220.43
NetD5_2: D5.2 D6.1 | length 263.9
  Bottom Layer w10: 3431.65,3210.43 3571.93,3210.43 3659.33,3123.03
NetD6_2: D6.2 R2.1 | length 272.3
  Bottom Layer w10: R2.1@3151.54,2995 3375.24,2995 3409.57,3029.33
NetD7_1: D7.1 U3.3 | length 199
  Top Layer w10: U3.3 3276.3,2727.09 3341.26,2727.09 3363.77,2749.6 3377.91,2749.6 3399.49,2771.17 D7.1@3399.49,2807.95
NetD7_2: D7.2 D8.1 | length 210.9
  Top Layer w10: D7.2@3476.77,2785.32 3489.68,2785.32 3494.68,2780.32 3685.63,2780.32
NetD8_2: D8.2 D9.1 | length 213.8
  Top Layer w10: D8.2@3792.91,2780.32 3810.32,2780.32 3815,2785 3997.72,2785 4002.72,2780
NetD9_2: D9.2 D10.1 | length 332.7
  Top Layer w10: D9.2@4110,2780 v1@4310,2780
  Bottom Layer w10: D10.1 v1(4305,2780)
NetD10_2: D10.2 D11.1 | length 262.5
  Bottom Layer w10: D11.1 4109.65,2785 4114.65,2780
NetD11_2: D11.2 D12.1 | length 204
  Bottom Layer w10: D12.1 3746.61,2785.32 D11.2
NetD12_2: D12.2 R4.1 | length 271.6
  Bottom Layer w10: R4.1 3216.89,2674.57 3327.64,2785.32 D12.2
NetD13_2: D13.2 J1.3 | length 176.3
  Top Layer w10: J1.3 2866.93,2870 D13.2
NetD14_2: D14.2 J1.2 | length 177.1
  Top Layer w10: J1.2 2865,2970 D14.2@2870,2975
NetD15_2: D15.2 J1.1 | length 197
  Bottom Layer w10: J1.1 2755,3070 2796.14,3111.14 D15.2
NetD?_1: D?.1@13641.97,1352.24 D?.2@13275,1257.76
NetD?_2: D?.2@15090,1257.76 R?.1@13005,1258.46
NetR5_2: R5.2 U2.1 | length 65.4
  Top Layer w10: R5.2 3056.69,3121.69 U2.1
NetR7_2: R7.2 U3.1 | length 112.4
  Top Layer w10: R7.2 3101.89,2685 3116.57,2699.69 3116.57,2709.18 3142.52,2735.12 3160.31,2735.12 U3.1
NetR?_2: R?.2@12230.43,1435 U?.1@12507.6,1356.69
OUT: R5.1 R6.2 R?.1@12159.57,1435 R?.2@10945.51,1445 U1.3 U?.3@7602.72,1330 | length 301
  Top Layer w10: R6.2 3045,3190.87 3061.89,3190.87 3080,3208.98 3080,3246.31 3085,3251.31 v1(3085,3255)
  Bottom Layer w10: v1(3085,3255) 3085,3238.27 3168.27,3155 U1.3
RED_IN: C1.1 C?.1@8457.52,1440 D15.1 D18.1 D?.1@11457.8,1340 D?.1@11845,1306.93 R1.2 R?.2@8175.51,1445 U1.4 U1.8 U?.4 U?.8 | length 956.8
  Top Layer w10: C1.1@2820,3246.97 2821.97,3245 R1.2 2890,3255 v1(2925,3255)
  Bottom Layer w10: D18.1 2875,2790.59 D15.1 2894.02,3014.02 2894.02,3060.32 2914.02,3080.32 2914.02,3141.96 2905.23,3150.75 2900.86,3150.75 2895,3156.61 2895,3235 2912.39,3252.39 2922.39,3252.39 v1(2925,3255) U1.8 2985,3255 2990,3250 2990.55,3250.55 2991.61,3250.55 3137.17,3105 U1.4
TRIG: C3.1 C?.1@7082.52,1440 R3.1 R?.1@7249.49,1445 U1.2 U1.6 U?.2@7602.72,1380 U?.6 | length 989.2
  Top Layer w10: v1(2930,3165) 2933.5,3165 2974.02,3124.49 R3.1 3002.57,3124.49 3008.43,3118.63 3008.43,3089.1 3018.39,3079.13 3138.5,3079.13 ; v1(3228.07,3233.26) 3225.38,3233.26 3207.77,3250.87 3124.1,3250.87 3115.31,3242.08 3115.31,3174.53 3124.85,3165 3137.75,3165 3147.28,3155.47 3147.28,3087.92 3138.5,3079.13 ; C3.1 3237.48,2963.39 3215.82,2985.05 3215.82,3013.78 3164.6,3065 3160,3065 3145.87,3079.13 3138.5,3079.13
  Bottom Layer w10: v1(2930,3165) 2940.01,3165 2950.01,3155 U1.6 ; U1.2 3200.35,3205 3228.07,3232.72 v1(3228.07,3233.26)
pads on no net: D?.1@8846.57,1330 D?.1@9191.57,1330 D?.1@9536.57,1330 D?.1@9881.57,1330 D?.1@10226.57,1330 D?.1@10571.57,1330 D?.1@13276.97,1352.24 D?.1@14001.97,1352.24 D?.1@14366.97,1352.24 D?.1@14731.97,1352.24 D?.1@15091.97,1352.24 D?.2@8953.86,1330 D?.2@9298.86,1330 D?.2@9643.86,1330 D?.2@9988.86,1330 D?.2@10333.86,1330 D?.2@10678.86,1330 D?.2@11845,1423.07 D?.2@12015,1423.07 D?.2@12365,1423.07 D?.2@13640,1257.76 D?.2@14000,1257.76 D?.2@14365,1257.76 D?.2@14730,1257.76 J?.1 J?.2 J?.3 R?.1@8629.57,1435 R?.2@8005.43,1435 U1.5 U?.1@8282.6,1356.69 U?.3@8320,1443.31 U?.3@12545,1443.31 U?.5

## Polygon pours and split planes (outlines as drawn)
no net on Bottom Layer "NONET_L02_P000" (solid, pour order 0): 2550,3340 3205,3340 3205,2635 2555,2635
no net on Top Layer "NONET_L01_P001" (solid, pour order 1): 2550,3340 3205,3340 3210,3335 3210,2620 3200,2610 2550,2610

## Silkscreen, mask and mechanical layers (free items; w line width, h text height)
Top Overlay:
  text "TSAL 2020" at 4559,3331 h39.37 r270
  text "UBC Formula Electric" at 4466,3326 h39.37 r270
  text "Pedro L." at 4370,3323 h39.37 r270
Bottom Overlay:
  drawing of 2532 lines, arcs and shapes, not listed